# Altium PCB JacDacRHTemp 18.PcbDoc
Units mm, origin at the board's own origin, x right, y up, seen from the top; angles counter-clockwise.
Board outline 9.15 x 28.22 mm, 2 copper layers (Top Layer, Bottom Layer), stack 1.525 mm thick; 27 components, 19 nets, 93 pads, 16 vias.
Unrouted connection lines stored in the file: 14.
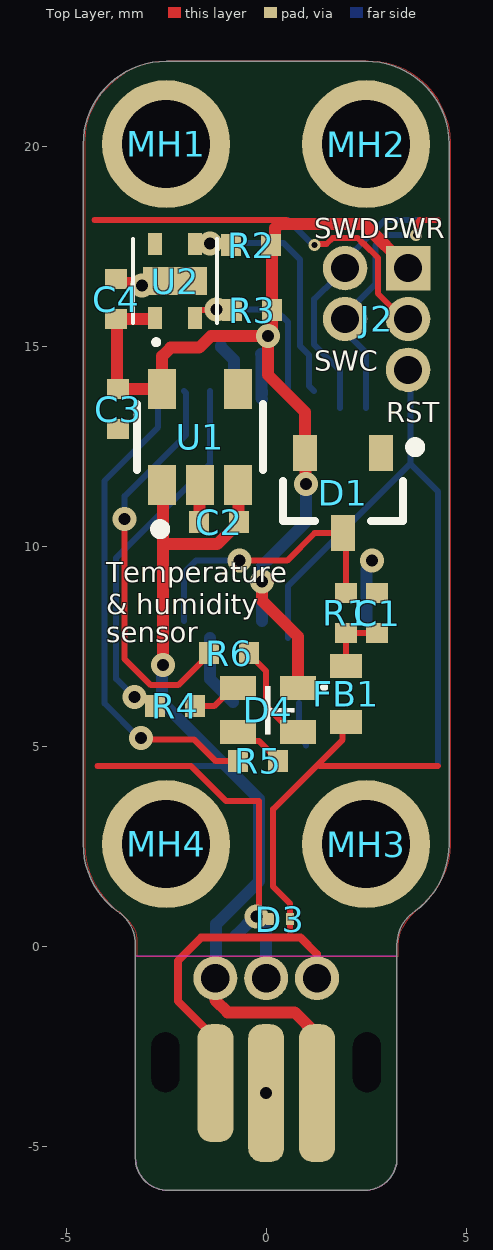
[diagram p0: Top Layer view]
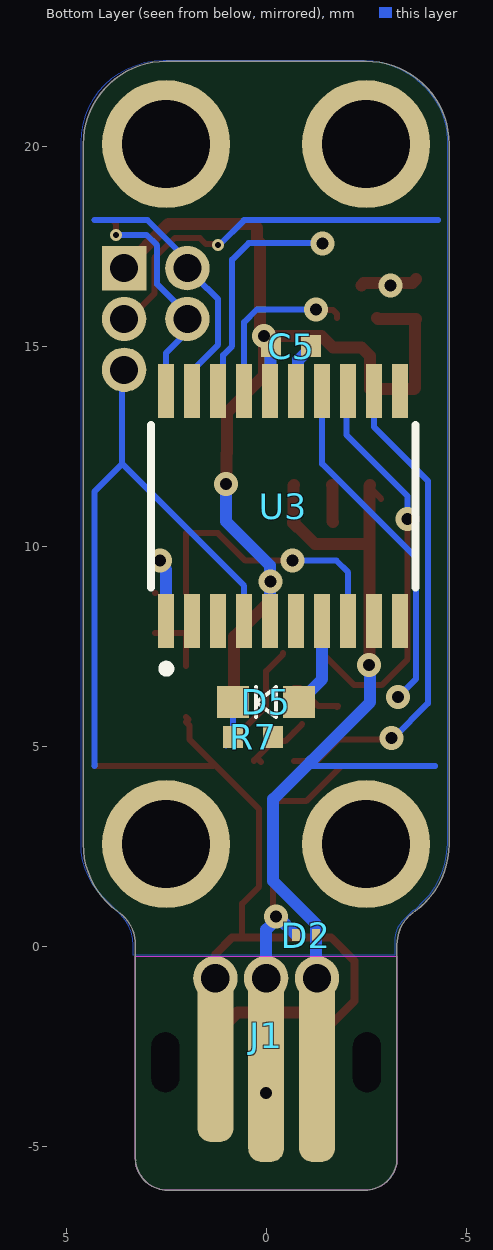
[diagram p1: Bottom Layer view, seen from below]
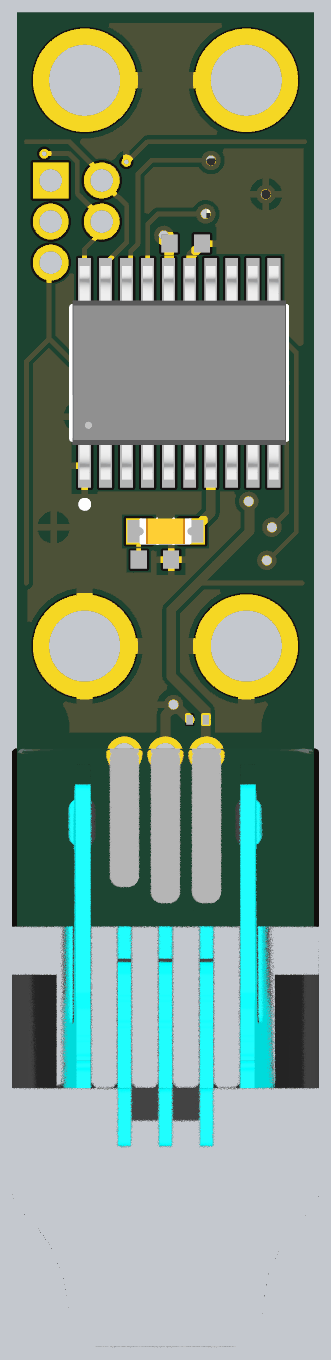
[diagram p2: 3D render of the assembled board from below, using the file's embedded part models]

## Layer stack, top to bottom
Top Solder: solder mask 0.0102, Solder Resist, Dk 3.5
Top Layer: signal copper 0.0356
Dielectric 1: core 1.454, FR-4, Dk 4.2
Bottom Layer: signal copper 0.0356
Bottom Solder: solder mask 0.0102, Solder Resist, Dk 3.5

## Board outline
-3.725,0.877 cw(c-4.27,0.039) -3.27,0.039 -3.27,-5.3 ccw(c-2.47,-5.3) -2.47,-6.1 2.47,-6.1 ccw(c2.47,-5.3) 3.27,-5.3 3.27,0.039 cw(c4.27,0.039) 3.725,0.877 ccw(c2.5,2.55) 4.573,2.55 4.573,20.05 ccw(c2.5,20.05) 2.5,22.123 -2.5,22.123 ccw(c-2.5,20.05) -4.573,20.05 -4.574,20.05 -4.574,2.55 ccw(c-2.5,2.55)

## Design rules (kind name [scope] priority, off if disabled: settings)
AssemblyTestPointUsage [All] p1: valid=2
BoardOutlineClearance [All] p1: gap=0.3 ignorepadtopadclearanceinfootprint=FALSE except(0: Arc-SplitContinuation Track-SplitContinuation SMDPad-OutlineEdge SMDPad-SplitContinuation THPad-OutlineEdge THPad-SplitContinuation Via-SplitContinuation Fill-SplitContinuation Poly-SplitContinuation Region-OutlineEdge Region-SplitContinuation Text-SplitContinuation; 0.2: Track-OutlineEdge Text-OutlineEdge)
Clearance [All] p1: gap=0.125 ignorepadtopadclearanceinfootprint=FALSE except(0: Arc-Hole Track-Hole SMDPad-Hole THPad-Hole Via-Hole Fill-Hole Poly-Hole Region-Hole Text-Hole)
ComponentClearance [All] p1: gap=0.2 collisioncheckmode=3 verticalgap=0.2 showdistances=FALSE
DiffPairsRouting [All] p1: maxlimit=2 minlimit=0.15 mostfreqgap=0.15 toplayer_minwidth=0.15 toplayer_maxwidth=2 toplayer_prefwidth=0.15 bottomlayer_minwidth=0.15 bottomlayer_maxwidth=2 bottomlayer_prefwidth=0.15 substack1={CB9D278B-8BF5-444A-AAF4-837A2A9DF42D} toplayer_{cb9d278b-8bf5-444a-aaf4-837a2a9df42d}_minwidth=0.381 toplayer_{cb9d278b-8bf5-444a-aaf4-837a2a9df42d}_maxwidth=0.381 toplayer_{cb9d278b-8bf5-444a-aaf4-837a2a9df42d}_prefwidth=0.381 bottomlayer_{cb9d278b-8bf5-444a-aaf4-837a2a9df42d}_minwidth=0.381 bottomlayer_{cb9d278b-8bf5-444a-aaf4-837a2a9df42d}_maxwidth=0.381 bottomlayer_{cb9d278b-8bf5-444a-aaf4-837a2a9df42d}_prefwidth=0.381 substack2={826B8647-A721-4255-895A-19F9591B9CD1} toplayer_{826b8647-a721-4255-895a-19f9591b9cd1}_minwidth=0.381 toplayer_{826b8647-a721-4255-895a-19f9591b9cd1}_maxwidth=0.381 toplayer_{826b8647-a721-4255-895a-19f9591b9cd1}_prefwidth=0.381 bottomlayer_{826b8647-a721-4255-895a-19f9591b9cd1}_minwidth=0.381 bottomlayer_{826b8647-a721-4255-895a-19f9591b9cd1}_maxwidth=0.381 bottomlayer_{826b8647-a721-4255-895a-19f9591b9cd1}_prefwidth=0.381 substack3={E64FCAF4-1BC8-437D-B1E0-0E5F2DC0F59E} toplayer_{e64fcaf4-1bc8-437d-b1e0-0e5f2dc0f59e}_minwidth=0.381 toplayer_{e64fcaf4-1bc8-437d-b1e0-0e5f2dc0f59e}_maxwidth=0.381 toplayer_{e64fcaf4-1bc8-437d-b1e0-0e5f2dc0f59e}_prefwidth=0.381 bottomlayer_{e64fcaf4-1bc8-437d-b1e0-0e5f2dc0f59e}_minwidth=0.381 bottomlayer_{e64fcaf4-1bc8-437d-b1e0-0e5f2dc0f59e}_maxwidth=0.381 bottomlayer_{e64fcaf4-1bc8-437d-b1e0-0e5f2dc0f59e}_prefwidth=0.381 substack4={E61CE66C-507C-4E1E-8E83-C905434AFC1C} toplayer_{e61ce66c-507c-4e1e-8e83-c905434afc1c}_minwidth=0.381 toplayer_{e61ce66c-507c-4e1e-8e83-c905434afc1c}_maxwidth=0.381 toplayer_{e61ce66c-507c-4e1e-8e83-c905434afc1c}_prefwidth=0.381 bottomlayer_{e61ce66c-507c-4e1e-8e83-c905434afc1c}_minwidth=0.381 bottomlayer_{e61ce66c-507c-4e1e-8e83-c905434afc1c}_maxwidth=0.381 bottomlayer_{e61ce66c-507c-4e1e-8e83-c905434afc1c}_prefwidth=0.381 maxuncoupledlength=25
FabricationTestPointUsage [All] p1: valid=2 allowmultiple=FALSE
HoleSize [All] p1: absolutevalues=TRUE maxlimit=2.54 minlimit=0.2 maxpercent=80.000 minpercent=20.000
MinimumSolderMaskSliver [All] p1: minsoldermaskwidth=0.005
PlaneClearance [All] p1: clearance=0.3
PlaneConnect [All] p1: planeconnectstyle=Relief reliefexpansion=0.5 reliefentries=4 reliefconductorwidth=0.2 reliefairgap=0.3
PolygonConnect "PolygonConnect GND" [isVIA] p1: connectstyle=Relief reliefconductorwidth=0.2 reliefentries=4 polygonreliefangle="90 Angle" airgapwidth=0.2
PolygonConnect [All] p2: connectstyle=Relief reliefconductorwidth=0.2 reliefentries=4 polygonreliefangle="90 Angle" airgapwidth=0.2
RoutingVias [All] p1: holewidth=0.3 width=0.6 viastyle="Through Hole" minholewidth=0.3 minwidth=0.6 maxholewidth=0.3 maxwidth=0.8
SilkToSilkClearance [All] p1: silktosilkclearance=0.001
SilkToSolderMaskClearance [IsPad] p1: minsilkscreentomaskgap=0.05 clearancetoexposedcopper=TRUE
SolderMaskExpansion [All] p1: expansion=0.075 istentingtop=FALSE
Width [All] p1: maxlimit=2 minlimit=0.15 preferedwidth=0.15 substack1={CB9D278B-8BF5-444A-AAF4-837A2A9DF42D} substack2={826B8647-A721-4255-895A-19F9591B9CD1} substack3={E64FCAF4-1BC8-437D-B1E0-0E5F2DC0F59E} substack4={E61CE66C-507C-4E1E-8E83-C905434AFC1C} minimp=50.000000 maximp=50.000000 favimp=50.000000
20 further rules are at their usual default settings.

## Components (designator, comment, footprint, x,y, rotation, side; value= is the part's Value field where it differs from the comment)
C1 "CL05C330JB51PNC" "C0402_0.55MM - without outline" 2.775,8.325 r270 top
C2 "CL05A105KP5NNNC" "C0402_0.55MM - without outline" -1.175,10.6 r0 top
C3 "CL05A105KP5NNNC" "C0402_0.55MM - without outline" -3.7,13.425 r90 top
C4 "CL05A105KP5NNNC" "C0402_0.55MM - without outline" -3.75,16.175 r270 top
C5 "CL05A105KP5NNNC" "C0402_0.55MM - without outline" -0.625,15 r0 bottom
D1 "BAT54S" NXP-BAT54S-TO-236AB 1.925,11.325 r270 top
D2 "VBUS05B1-SD0-G4-08" "0201-VBUS05B1-SD0-G4-08 - Without outline" -1,0.275 r0 bottom
D3 "VBUS05B1-SD0-G4-08" "0201-VBUS05B1-SD0-G4-08 - Without outline" 0.35,0.675 r180 top
D4 "HSMF-C114" HSMF-C114 0.05,5.9 r180 top
D5 "SML-D12D" "Rohm SML-D12 Orange - without outline" 0,6.1 r180 bottom
FB1 "TDK MPZ1608S102ATA00" "TDK MPZ1608 0.8mm - without outline" 2,6.3 r90 top
J1 "3 pin JACDAC edge connector" "JACDAC_EDGE_CONNECTOR_9.15MM_PCB_WIDE _without_MH" 0,-0.8 r0 bottom
J2 "Hack Connect Mini 1.27 mm pitch 2-row" HACK_CONNECT_MINI_5_X_1_27 3.55,16.95 r180 top
MH1 "MH_3.9MMNC_2.2MMD" MH_3.9MMC_2.2MMD_FULL_CIRCLE -2.5,20.05 r0 top
MH2 "MH_3.9MMNC_2.2MMD" MH_3.9MMC_2.2MMD_FULL_CIRCLE 2.5,20.05 r0 top
MH3 "MH_3.9MMNC_2.2MMD" MH_3.9MMC_2.2MMD_FULL_CIRCLE 2.5,2.55 r0 top
MH4 "MH_3.9MMNC_2.2MMD" MH_3.9MMC_2.2MMD_FULL_CIRCLE -2.5,2.55 r0 top
R1 "RC0402FR-07220RL" "R0402 - Without outline" 2,8.325 r270 top
R2 "10k" "R0402 - Without outline" -0.375,17.525 r180 top
R3 "10k" "R0402 - Without outline" -0.35,15.9 r180 top
R4 "RC0402FR-0730RL" "R0402 - WITHOUT OUTLINE" -2.275,6 r180 top
R5 "RC0402FR-0730RL" "R0402 - WITHOUT OUTLINE" -0.2,4.625 r180 top
R6 "RC0402FR-07150RL" "R0402 - Without outline" -0.925,7.325 r180 top
R7 "RC0402FR-071KL" "R0402 - Without outline" 0.325,5.225 r0 bottom
U1 "LDO 3.3V/300 mA" ON_SEMI-SOT23-5 -1.65,12.725 r90 top
U2 "SHTC3" SHTC3_4_WDFN -2.275,16.625 r90 top
U3 "STM32F030F4P6" 20-TSSOP -0.425,11 r90 bottom

## Footprints (in the part's own frame and the unit in brackets; to place one, negate y for a bottom-side part, rotate by r counter-clockwise, add the part's x,y. Pads: shape width x height; smd on the part's side, far side on the other; paste and mask are expansions set on the pad)
20-TSSOP [mm]
  rect 1.35x0.4 smd: 1(-2.875,2.925) 2(-2.875,2.275) 3(-2.875,1.625) 4(-2.875,0.975) 5(-2.875,0.325) 6(-2.875,-0.325) 7(-2.875,-0.975) 8(-2.875,-1.625) 9(-2.875,-2.275) 10(-2.875,-2.925) 11(2.875,-2.925) 12(2.875,-2.275) 13(2.875,-1.625) 14(2.875,-0.975) 15(2.875,-0.325) 16(2.875,0.325) 17(2.875,0.975) 18(2.875,1.625) 19(2.875,2.275) 20(2.875,2.925)
  silkscreen extent -4.16,-3.3 2.03,3.3, body extent -3.3,-3.3 3.3,3.3, height 1.2
"0201-VBUS05B1-SD0-G4-08 - Without outline" [mm]
  rect 0.2x0.3 smd mask+0.05: 1(-0.25,0) 2(0.25,0)
  body extent -0.3,-0.15 0.3,0.15, height 0.22
"C0402_0.55MM - without outline" [mm]
  rect 0.5x0.55 smd: 1(-0.5,0) 2(0.5,0)
  body extent -0.5,-0.25 0.5,0.25, height 0.55
HACK_CONNECT_MINI_5_X_1_27 [mm]
  rect 1.11x1.11 hole 0.7: 1(0,0)
  round 1.11 hole 0.7: 2(1.578,0) 3(0,1.27) 4(1.578,1.27) 5(0,2.54)
HSMF-C114 [mm] "LED RGB DIFFUSED CHIP SMD"
  rect 0.9x0.6 smd mask+0.05: 1(-0.75,-0.55) 2(-0.75,0.55) 3(0.75,0.55) 4(0.75,-0.55)
  silkscreen extent -1.45,-0.62 0.07,0.6, body extent -0.8,-0.75 0.8,0.75, height 0.55
"JACDAC_EDGE_CONNECTOR_9.15MM_PCB_WIDE _without_MH" [mm] "JacDac 3 pin connector without mounting holes"
  rrect78% 0.9x2.95 smd far side mask+0: 1(-1.27,2.625)
  round 1.11 / inner round 0.71 / far side round 1.1 hole 0.71 paste-0.254 mask+0: 1(1.27,0) 2(0,0) 3(-1.27,0)
  rrect78% 0.9x4.3 smd mask+0: 1(1.27,1.95)
  rrect78% 0.9x4.8 smd mask+0: 2(0,2.2) 3(-1.27,2.2)
  rrect78% 0.9x3.45 smd far side mask+0: 2(0,2.875) 3(1.27,2.875)
  round 0 hole 0.7 slot 1.5 at 90 deg unplated: ""(-2.52,2.1) ""(2.52,2.1)
  Top Layer keep-out region: -3.27,-0.55 -3.27,4.5 -3.209,4.806 -3.036,5.066 -2.776,5.239 -2.47,5.3 -2.47,5.3 2.47,5.3 2.776,5.239 3.036,5.066 3.209,4.806 3.27,4.5 3.27,4.5 3.27,-0.55
  Bottom Layer lines w0.2: -1.27,2.625 -1.27,1.513 -2.21,0.573 -2.21,-0.432 -1.626,-1.016 0.254,-1.016 0.554,-1.016 0.854,-1.016 1.27,-0.6 1.27,0
  Bottom Layer lines w0.3: -1.27,0 -1.27,0.55 -0.965,0.855 0.713,0.855 1.27,1.412 1.27,2.875
  Bottom Layer keep-out region: -3.27,-0.55 -3.27,4.5 -3.209,4.806 -3.036,5.066 -2.776,5.239 -2.47,5.3 -2.47,5.3 2.47,5.3 2.776,5.239 3.036,5.066 3.209,4.806 3.27,4.5 3.27,4.5 3.27,-0.55
  body extent -4.75,-0.18 4.75,20.32, height 1.52
MH_3.9MMC_2.2MMD_FULL_CIRCLE [mm] "Mounting Hole 3.9mm Diameter, 2.2mm PTH with 3.2 annualar ring"
  round 3.2 hole 2.2 mask+0.05: 1(0,0)
NXP-BAT54S-TO-236AB [mm] "SOT23, 3-Leads, Body 2.90x2.30mm, Pitch 0.95mm, IPC Medium Density"
  rect 0.9x0.6 smd: 1(-1,0.95) 2(-1,-0.95) 3(1,0)
  silkscreen extent -1.27,-1.5 0.7,1.93, body extent -1.32,-1.5 1.32,1.5, height 1.12
ON_SEMI-SOT23-5 [mm]
  rect 1x0.7 smd: 1(-1.2,0.95) 2(-1.2,0) 3(-1.2,-0.95) 4(1.2,-0.95) 5(1.2,0.95)
  silkscreen extent -2.42,-1.58 0.82,1.58, body extent -1.5,-1.57 1.5,1.58, height 1.1
"R0402 - Without outline" [mm]
  rect 0.5x0.55 smd: 1(-0.5,0) 2(0.5,0)
  body extent -0.5,-0.25 0.5,0.25, height 0.35
"R0402 - WITHOUT OUTLINE" [mm]
  rect 0.5x0.55 smd: 1(-0.5,0) 2(0.5,0)
  body extent -0.5,-0.25 0.5,0.25, height 0.35
"Rohm SML-D12 Orange - without outline" [mm]
  rect 0.8x0.8 smd paste-0.05: 1(-0.825,0) 2(0.825,0)
  silkscreen extent -0.25,-0.38 0.25,0.38, body extent -0.8,-0.4 0.8,0.4, height 0.54
SHTC3_4_WDFN [mm] "Humidity Temperature Sensor 0 ~ 100% RH I²C ±2% RH 8s Surface Mount"
  rect 0.55x0.35 smd paste-0.5 mask+0.05: 1(-0.925,0.5) 2(-0.925,-0.5)
  rect 0.55x0.35 smd paste-0.6 mask+0.05: 3(0.925,-0.5)
  rect 0.55x0.35 smd paste-0.2 mask+0.05: 4(0.925,0.5)
  rect 0.7x1.6 smd paste-0.1 mask+0.05: 5(0,0)
  rect 0.45x0.35 on Top Paste paste-0.6 mask+0.05: ""(-0.875,-0.5) ""(-0.875,0.5) ""(0.875,-0.5) ""(0.875,0.5)
  silkscreen extent -1.57,-1.05 1.05,1.05, body extent -1,-1 1,1, height 0.75
"TDK MPZ1608 0.8mm - without outline" [mm]
  rect 0.6x0.8 smd paste-0.1: 1(-0.7,0) 2(0.7,0)
  body extent -0.8,-0.4 0.8,0.4, height 0.8

## Part data
C1: "CAP CER 33PF 50V NP0 0402", Capacitance=33pF, Case Code (Imperial)=0402, Case Code (Metric)=1005, Manufacturer=Samsung, Max Operating Temperature=125°C, Min Operating Temperature=-55°C, Ratings=AEC-Q200, Supplier Part Number 1=1276-6515-1-ND, Tolerance=5%, Voltage Rating=50V, Case/Package=0402, Category=Capacitors, Checked=?, ComponentLink1Description="Samsung datasheet online", ComponentLink1URL=http://www.samsungsem.com/kr/support/library/product-catalog/mlcc.jsp, Created=DG, Lead Free="Lead Free", Length=0.039inch, Manufacturer Part Number=CL05C330JB51PNC, Mount="Surface Mount", Packaging="Tape and Reel", Pricing 1="1=0.10000, 10=0.07500, 50=0.04060, 100=0.03320, 500=0.02374, 1000=0.01865, 2500=0.01696, 5000=0.01560 (USD)", Pricing 2="1=0.11000, 10=0.08200, 100=0.03600, 500=0.02600, 1000=0.02000, 2500=0.01800 (USD)", Pricing 3="10000=0.00780 (USD)", RoHS=Yes, Stock 1=250654, Stock 2=97900, Stock 3=100000, Supplier 1=Digi-Key, Supplier 2=Mouser, Supplier 3="Future Electronics", Supplier Part Number 2=187-CL05C330JB51PNC, Supplier Part Number 3=6022520, Thickness=0.022inch, Width=0.02inch
C2 C3 C4 C5: "CAP CER 1UF 10V X5R 0402", Capacitance=1µF, Case Code (Imperial)=0402, Case Code (Metric)=1005, Dielectric=X5R, Manufacturer=Samsung, Max Operating Temperature=85°C, Min Operating Temperature=-55°C, Package Quantity=1, Supplier Part Number 1=1276-1076-1-ND, Tolerance=10%, Voltage Rating=10V, Case/Package=0402, Category=Capacitors, Checked=?, ComponentLink1Description="Online datasheet", ComponentLink1URL=https://datasheet.ciiva.com/15195/getdatasheetpartid-358390-15195630.pdf, Contact Plating=Tin, Created=DG, Depth=0.5mm, Height=0.5mm, Length=1mm, Manufacturer Part Number=CL05A105KP5NNNC, Material=Ceramic, Mount="Surface Mount", Packaging="Tape and Reel", Pricing 1="1=0.10000, 10=0.03900, 50=0.02100, 100=0.01720, 500=0.01228, 1000=0.00965, 2500=0.00877, 5000=0.00807 (USD)", Pricing 2="1=0.10000, 10=0.04200, 100=0.01800, 500=0.01300, 1000=0.01000, 2500=0.00900 (USD)", Pricing 3="10=0.02450, 100=0.02000, 500=0.01310, 2500=0.00920, 5000=0.00810, 10000=0.00640, 50000=0.00490 (GBP)", Radiation Hardening=No, RoHS=Yes, Stock 1=5705569, Stock 2=928941, Stock 3=53670, Supplier 1=Digi-Key, Supplier 2=Mouser, Supplier 3=Farnell, Supplier Part Number 2=187-CL05A105KP5NNNC, Supplier Part Number 3=3013329, Thickness=0.022inch, Width=0.02inch
D1: "DIODE ARRAY SCHOTTKY 30V SOT23", Manufacturer=Nexperia, Manufacturer Part Number=BAT54S,235, Supplier Part Number 1=1727-1868-1-ND, Category="Rectifier Diodes", ComponentLink1Description="NXP datasheet online", ComponentLink1URL=https://assets.nexperia.com/documents/data-sheet/BAT54_SER.pdf, Pricing 1="1=0.13000, 10=0.11900, 100=0.05610, 500=0.03326, 1000=0.02185, 5000=0.02138 (USD)", RoHS=No, Stock 1=14011, Supplier 1=Digi-Key, Supplier 2=Mouser, Supplier 3=RSComponents, Supplier Part Number 2=771-BAT54S235, Supplier Part Number 3=1707990
D2 D3: "TVS DIODE 5.5V 18V CLP0603", Capacitance=0.4pF, Case Code (Imperial)=0201, Case Code (Metric)=0603, Clamping Voltage=18V, Manufacturer="Vishay Semiconductors", Max Operating Temperature=150°C, Min Breakdown Voltage=6V, Min Operating Temperature=-55°C, Peak Pulse Current=2.5A, Peak Pulse Power=45W, Power Line Protection=No, Resistor Type=Zener, Reverse Standoff Voltage=5.5V, Supplier Part Number 1=VBUS05B1-SD0-G4-08GICT-ND, Case/Package=0201, Category="TVS Diodes", Checked By=?, ComponentLink2Description="Online datasheet", ComponentLink2URL=http://www.vishay.com/docs/85899/vbus05b1-sd0.pdf, Created By="D. Gakure", Direction=Bidirectional, Element Configuration=Single, Manufacturer Part Number=VBUS05B1-SD0-G4-08, Mount="Surface Mount", Number of Bidirectional Channels=1, Number of Pins=2, Packaging="Tape and Reel", Pricing 1="1=0.27000, 10=0.18500, 100=0.09020, 500=0.07524, 1000=0.05228, 2000=0.04531, 5000=0.04203 (USD)", Pricing 2="5=0.20800, 10=0.14000, 100=0.06340, 500=0.05020, 1000=0.04160, 5000=0.03300 (GBP)", Pricing 3="1=0.27000, 10=0.18500, 50=0.18500, 100=0.09300, 1000=0.03900, 10000=0.03400 (USD)", Pricing 4="1=0.17630, 10=0.14370, 25=0.14230, 100=0.07810, 250=0.07660, 500=0.06310, 15000=0.02980, 150000=0.02970, 1500000=0.02870, 7500000=0.02800 (USD)", RoHS=Yes, Stock 1=22028, Stock 2=13100, Stock 3=1209, Stock 4=719, Supplier 1=Digi-Key, Supplier 2=Farnell, Supplier 3=Mouser, Supplier 4="Arrow Electronics", Supplier Part Number 2=2932858, Supplier Part Number 3=78-VBUS05B1SD0-G4-08, Supplier Part Number 4=VBUS05B1-SD0-G4-08, Working Voltage=5.5V
D4: "Red, Green, Blue (RGB) 626nm Red, 525nm Green, 470nm Blue LED Indication - Discrete 1.9V Red, 3.4V Green, 3.4V Blue 0606 (1616 Metric)", Case Code (Imperial)=0606, Case Code (Metric)=1616, Color=Blue,Green,Red, Forward Current=20mA, Forward Voltage=3.4V, Lens Color=White, Manufacturer="Broadcom Avago", Max Operating Temperature=85°C, Min Operating Temperature=-40°C, Package Quantity=4000, Power Rating=78mW, Reverse Voltage=5V, Supplier Part Number 1=516-1795-1-ND, Case/Package=0606, Category=Optoelectronics, Checked By=?, ComponentLink1Description="Online datasheet", ComponentLink1URL=https://docs.broadcom.com/docs/AV02-2451EN, Created By="D. Gakure", Depth=1.6mm, Dominant Wavelength=470nm, Height=0.35mm, Lead Free="Lead Free", Length=1.6mm, Lens Style=Diffused,Rectangular, Lens Transparency=Diffused, Luminous Intensity=70mcd, Manufacturer Part Number=HSMF-C114, Mount="Surface Mount", Number of Elements=3, Number of LEDs=3, Number of Pins=4, Packaging="Tape and Reel", Pricing 1="1=1.78000, 10=1.12500, 100=0.83250, 500=0.76500, 1000=0.63000, 2000=0.59850 (USD)", Pricing 2="1=1.56000, 10=0.97100, 25=0.87800, 50=0.78500, 100=0.69200, 500=0.60500 (GBP)", Pricing 3="1=1.69000, 10=1.13000, 50=1.13000, 100=0.85600, 1000=0.74800, 10000=0.74800 (USD)", Radiation Hardening=No, REACH SVHC="No SVHC", RoHS=Yes, Stock 1=20555, Stock 2=8134, Stock 3=14991, Supplier 1=Digi-Key, Supplier 2=Farnell, Supplier 3=Mouser, Supplier Part Number 2=1058362, Supplier Part Number 3=630-HSMF-C114, Test Current=20mA, Viewing Angle=145°, Wavelength=470nm, Width=1.5mm
D5: "1.6 x 0.8 x 0.55mm (0603) LED 605nm Orange", Colour=Orange, Current - Test=20mA, Luminous Flux @ Current - Test=-, Manufacturer="Rohm Semiconductor", Manufacturer Part Number=SML-D12D8WT86, Millicandela Rating=100mcd, Package / Case="0603 (1608 Metric)", Supplier Part Number 1=511-1577-1-ND, Voltage - Forward (Vf) (Typ)=2.2V, Category=Optoelectronics, ComponentLink1Description=http://rohmfs.rohm.com/en/products/databook/datasheet/opto/led/chip_mono/sml-d1.pdf, ComponentLink1URL=http://rohmfs.rohm.com/en/products/databook/datasheet/opto/led/chip_mono/sml-d1.pdf, Height=0.55mm, Lens Style/Size="Rectangle with Flat Top, 1.2mm x 0.8mm", Lens Type="Diffused, White", Mounting Type="Surface Mount", Packaging="Cut Tape (CT)", Pricing 1="1=0.38, 10=0.279, 25=0.2232, 100=0.1478, 250=0.1046, 500=0.08926, 1000=0.06974 (GBP)", RoHS="RoHS Compliant", Size / Dimension="1.60mm L x 0.80mm W", Stock 1=1719, Supplier 1=Digi-Key, Viewing Angle=-, Wavelength - Dominant=605nm, Wavelength - Peak=-
FB1: "0603 1k@100MHz 0.8A chip", Case Code (Imperial)=0603, Case Code (Metric)=1608, Current Rating=800mA, DC Resistance (DCR)=300mR, Manufacturer=TDK, Manufacturer Part Number=MPZ1608S102ATA00, Package Quantity=4000, Supplier Part Number 1=445-8694-1-ND, Tolerance=25%, Case/Package=0603, ComponentLink2Description="datasheet online", ComponentLink2URL=https://www.mouser.co.uk/datasheet/2/400/eads_commercial_power_mpz1608_en-923650.pdf, ComponentLink3Description=datasheet, ComponentLink3URL="Y:\System\Altium\Libraries 2014\TDK\Datasheets\eads_commercial_power_mpz1608_en-923650.pdf", Core Material=Ferrite, Height=0.037inch, Impedance="1kR @ 100MHz", Length=0.063inch, Max DC Current=800mA, Mount="Surface Mount", Packaging="Tape and Reel", Pricing 1="1=0.1, 10=0.079, 25=0.0716, 50=0.0644, 100=0.0472, 250=0.03432, 500=0.03146, 1000=0.02717 (USD)", Stock 1=113542, Supplier 1=Digi-Key, Supplier 2=Mouser, Supplier Part Number 2=810-MPZ1608S102ATA00, Width=0.031inch
J1: library part "JACDAC edge connector", "3 pin JACDAC edge connector 1.27mm pitch", Manufacturer Part Number=JACDAC_EDGE_CONNECTOR, Checked By=?, ComponentLink1Description="Yuliang JACDAC cable connector drawing online", ComponentLink1URL=https://github.com/microsoft/jacdac-mdk/blob/main/connector/JACDAC-Connector-by-Yuliang-2020-11-28.pdf, ComponentLink2Description="JACDAC PCB edge connector spec onlin", ComponentLink2URL=https://github.com/microsoft/jacdac-mdk/blob/main/connector/JACDAC_PCB_Edge_Connector_Drawing_JD-PEC-01_rev_01.pdf, Created By="D. Gakure", PCB Type="1.6mm FR4"
J2: library part HACK_CONNECT_MINI
MH1 MH2 MH3 MH4: library part MH_3.9MMNC_2.2MMD_FULL_CIR, "Mounting Hole 3.9mm Diameter with 3.2 annualar ring, 2.2mm Drill PTH"
R1: "RES SMD 220 OHM 1% 1/16W 0402", Case Code (Imperial)=0402, Case Code (Metric)=1005, Manufacturer=Yageo, Max Operating Temperature=155°C, Max Power Dissipation=63mW, Min Operating Temperature=-55°C, Package Quantity=1, Power Rating=62.5mW, Resistance=220R, Resistor Type="Thick Film", Supplier Part Number 1=311-220LRCT-ND, Temperature Coefficient=100ppm/°C, Tolerance=1%, Voltage Rating=50V, Case/Package=0402, Category=Resistors, Checked=?, ComponentLink1Description=https://datasheet.ciiva.com/11819/0900766b80c66297-11819466.pdf?src-supplier=RSComponents, ComponentLink1URL=https://datasheet.ciiva.com/11819/0900766b80c66297-11819466.pdf?src-supplier=RSComponents, ComponentLink2Description=https://datasheet.ciiva.com/2453/pyu-r-int-thick-7-2453460.pdf?src-supplier=Digi-Key, ComponentLink2URL=https://datasheet.ciiva.com/2453/pyu-r-int-thick-7-2453460.pdf?src-supplier=Digi-Key, ComponentLink3Description=https://datasheet.ciiva.com/2453/pyu-r-int-thick-7-2453461.pdf?src-supplier=Digi-Key, ComponentLink3URL=https://datasheet.ciiva.com/2453/pyu-r-int-thick-7-2453461.pdf?src-supplier=Digi-Key, ComponentLink4Description=https://datasheet.ciiva.com/2453/pyu-r-int-thick-7-2453462.pdf?src-supplier=Digi-Key, ComponentLink4URL=https://datasheet.ciiva.com/2453/pyu-r-int-thick-7-2453462.pdf?src-supplier=Digi-Key, ComponentLink5Description=https://datasheet.ciiva.com/16746/pyu-rc0402-51-rohs-l-6-r-16746831.pdf?src-supplier=Future+Electronics, ComponentLink5URL=https://datasheet.ciiva.com/16746/pyu-rc0402-51-rohs-l-6-r-16746831.pdf?src-supplier=Future+Electronics, Created=D.G, Depth=0.5mm, Features="Moisture Resistant", Height=0.016inch, Lead Free="Lead Free", Length=1mm, Manufacturer Part Number=RC0402FR-07220RL, Military Standard=Not, Number of Pins=2, Number of Terminations=2, Packaging="Tape and Reel", Pricing 1="1=0.10000, 10=0.01400, 100=0.00580, 1000=0.00262, 2500=0.00228, 5000=0.00188 (USD)", Pricing 2="1=0.10000, 10=0.01200, 100=0.00400, 1000=0.00400, 2500=0.00400, 10000=0.00300 (USD)", Pricing 3="1=0.08130, 25=0.01210, 100=0.01120, 250=0.01030, 500=0.00900 (GBP)", REACH SVHC="No SVHC", RoHS=Yes, Stock 1=1286042, Stock 2=324625, Stock 3=18234, Supplier 1=Digi-Key, Supplier 2=Mouser, Supplier 3=Farnell, Supplier Part Number 2=603-RC0402FR-07220RL, Supplier Part Number 3=2147864, Termination=SMD/SMT, Voltage Rating (DC)=50V, Width=0.02inch
R2 R3: library part RC0402FR-0710KL, "RES SMD 10K OHM 1% 1/16W 0402", Case Code (Imperial)=0402, Case Code (Metric)=1005, Manufacturer=Yageo, Max Operating Temperature=155°C, Min Operating Temperature=-55°C, Power Rating=62.5mW, Resistance=10kR, Resistor Type="Thick Film", Supplier Part Number 1=311-10.0KLRCT-ND, Temperature Coefficient=100ppm/°C, Tolerance=1%, Voltage Rating=50V, Case/Package=0402, Category=Resistors, Checked=?, ComponentLink1Description=https://datasheet.ciiva.com/7660/38568-7660787.pdf?src-supplier=Element14, ComponentLink1URL=https://datasheet.ciiva.com/7660/38568-7660787.pdf?src-supplier=Element14, ComponentLink2Description=https://datasheet.ciiva.com/7849/1784430-7849813.pdf?src-supplier=Element14, ComponentLink2URL=https://datasheet.ciiva.com/7849/1784430-7849813.pdf?src-supplier=Element14, ComponentLink3Description=https://datasheet.ciiva.com/7849/1686128-7849814.pdf?src-supplier=Element14, ComponentLink3URL=https://datasheet.ciiva.com/7849/1686128-7849814.pdf?src-supplier=Element14, ComponentLink4Description=https://datasheet.ciiva.com/7849/1784430-7849815.pdf?src-supplier=Element14, ComponentLink4URL=https://datasheet.ciiva.com/7849/1784430-7849815.pdf?src-supplier=Element14, ComponentLink5Description=https://datasheet.ciiva.com/22747/1018594-22747512.pdf?src-supplier=Element14, ComponentLink5URL=https://datasheet.ciiva.com/22747/1018594-22747512.pdf?src-supplier=Element14, ComponentLink6Description=https://datasheet.ciiva.com/12667/pyu-rc0402-51-rohs-l-6-r-12667067.pdf?src-supplier=Mouser, ComponentLink6URL=https://datasheet.ciiva.com/12667/pyu-rc0402-51-rohs-l-6-r-12667067.pdf?src-supplier=Mouser, ComponentLink7Description=https://datasheet.ciiva.com/7983/1018594-7983486.pdf?src-supplier=Element14, ComponentLink7URL=https://datasheet.ciiva.com/7983/1018594-7983486.pdf?src-supplier=Element14, Created=DG, Depth=0.5mm, Height=0.32mm, Lead Free="Lead Free", Lead Pitch=0.2mm, Length=1mm, Manufacturer Part Number=RC0402FR-0710KL, Military Standard=Not, Number of Pins=2, Number of Terminations=2, Packaging="Tape and Reel", Pricing 1="1=0.10000, 10=0.01400, 100=0.00580, 1000=0.00262, 2500=0.00228, 5000=0.00188 (USD)", Pricing 2="1=0.10000, 10=0.01300, 100=0.00400, 1000=0.00300, 2500=0.00300, 10000=0.00200 (USD)", Pricing 3="10000=0.00350 (GBP)", REACH SVHC="No SVHC", RoHS=Yes, Stock 1=40173593, Stock 2=23672167, Stock 3=370000, Supplier 1=Digi-Key, Supplier 2=Mouser, Supplier 3=Farnell, Supplier Part Number 2=603-RC0402FR-0710KL, Supplier Part Number 3=2363463, Termination=SMD/SMT, Voltage Rating (DC)=50V, Width=0.5mm, Working Voltage=50V
R4 R5: "RES SMD 30 OHM 1% 1/16W 0402", Case Code (Imperial)=0402, Case Code (Metric)=1005, Manufacturer=Yageo, Max Operating Temperature=155°C, Max Power Dissipation=63mW, Min Operating Temperature=-55°C, Resistance=30R, Resistance Tolerance=1%, Resistor Type="Thick Film", Supplier Part Number 1=311-30LRCT-ND, Temperature Coefficient=100ppm/°C, Voltage Rating=50V, Case/Package=0402, Category="Chip SMD Resistors", Checked By=?, ComponentLink1Description="Online datasheet", ComponentLink1URL=https://datasheet.ciiva.com/7849/1018594-7849958.pdf, Construction=Rectangular, Contact Plating=Tin,Matte, Created By="D. Gakure", Depth=0.5mm, Features="Moisture Resistant", Height=0.35mm, Lead Free="Lead Free", Length=1mm, Manufacturer Part Number=RC0402FR-0730RL, Military Standard=Not, Number of Terminations=2, Packaging="Tape and Reel", Power Rating=63mW, Pricing 1="1=0.10000, 10=0.01400, 100=0.00580, 1000=0.00260, 2500=0.00226, 5000=0.00186 (USD)", Pricing 2="1=0.10000, 10=0.01200, 50=0.01200, 100=0.00400, 1000=0.00400, 10000=0.00300 (USD)", Pricing 3="10=0.01210, 100=0.00420, 500=0.00370, 2500=0.00280, 5000=0.00250, 10000=0.00230, 50000=0.00150 (GBP)", REACH SVHC=Unknown, RoHS=Yes, RoHS Compliant=Yes, Series=RC, Size Code=0402, Stock 1=2973, Stock 2=41804, Stock 3=4422, Supplier 1=Digi-Key, Supplier 2=Mouser, Supplier 3=Farnell, Supplier Part Number 2=603-RC0402FR-0730RL, Supplier Part Number 3=1458775, Termination=SMD/SMT, Tolerance=1%, Voltage Rating (DC)=50V, Width=0.5mm
R6: "RES SMD 150 OHM 1% 1/16W 0402", Case Code (Imperial)=0402, Case Code (Metric)=1005, Manufacturer=Yageo, Max Operating Temperature=155°C, Max Power Dissipation=63mW, Min Operating Temperature=-55°C, Package Quantity=1, Power Rating=62.5mW, Resistance=150R, Resistance Tolerance=1%, Resistor Type="Thick Film", Supplier Part Number 1=311-150LRCT-ND, Temperature Coefficient=100ppm/°C, Voltage Rating=50V, Case/Package=0402, Category="Chip SMD Resistors", Checked By=?, ComponentLink1Description="ine datasheet", ComponentLink1URL=https://datasheet.ciiva.com/11808/0900766b80c66297-11808422.pdf, Construction=Rectangular, Created By="D. Gakure", Depth=0.5mm, Features="Moisture Resistant", Height=0.016inch, Lead Free="Lead Free", Length=1mm, Manufacturer Part Number=RC0402FR-07150RL, Military Standard=Not, Number of Terminations=2, Packaging="Tape and Reel", Pricing 1="1=0.10000, 10=0.01400, 100=0.00580, 1000=0.00260, 2500=0.00226, 5000=0.00186 (USD)", Pricing 2="1=0.10000, 10=0.01200, 50=0.01200, 100=0.00400, 1000=0.00400, 10000=0.00300 (USD)", Pricing 3="10000=0.00270, 50000=0.00200 (GBP)", REACH SVHC="No SVHC", RoHS=Yes, RoHS Compliant=Yes, Series=RC, Stock 1=5214533, Stock 2=582717, Stock 3=880000, Supplier 1=Digi-Key, Supplier 2=Mouser, Supplier 3=Farnell, Supplier Part Number 2=603-RC0402FR-07150RL, Supplier Part Number 3=2421893, Technology="THICK FILM", Termination=SMD/SMT, Tolerance=1%, Width=0.02inch, Working Voltage=50V
R7: "RES SMD 1K OHM 1% 1/16W 0402", Case Code (Imperial)=0402, Case Code (Metric)=1005, Manufacturer=Yageo, Max Operating Temperature=155°C, Min Operating Temperature=-55°C, Power Rating=62.5mW, Resistance=1kR, Resistor Type="Thick Film", Supplier Part Number 1=311-1.00KLRDKR-ND, Temperature Coefficient=100ppm/°C, Tolerance=1%, Voltage Rating=50V, Case/Package=0402, Category=Resistors, Checked=?, ComponentLink2Description="Online datasheet", ComponentLink2URL=https://datasheet.ciiva.com/12666/pyu-rc0402-51-rohs-l-6-r-12666741.pdf, Created=D.G, Depth=0.5mm, Height=0.32mm, Lead Free="Lead Free", Length=1mm, Manufacturer Part Number=RC0402FR-071KL, Military Standard=Not, Number of Pins=2, Packaging="Tape and Reel", Pricing 1="1=0.10000, 10=0.01400, 100=0.00580, 1000=0.00262, 2500=0.00228, 5000=0.00188 (USD)", Pricing 2="1=0.10000, 10=0.01200, 100=0.00400, 1000=0.00400, 2500=0.00400, 10000=0.00300 (USD)", Pricing 3="1=0.08130, 25=0.01210, 100=0.01120, 250=0.01030, 500=0.00900 (GBP)", REACH SVHC=Unknown, RoHS=Yes, Stock 1=37591306, Stock 2=11912978, Stock 3=29900, Supplier 1=Digi-Key, Supplier 2=Mouser, Supplier 3=Farnell, Supplier Part Number 2=603-RC0402FR-071KL, Supplier Part Number 3=2132441, Termination=SMD/SMT, Voltage Rating (DC)=50V, Width=0.5mm
U1: library part NCP114ASN330T1G, "ON SEMICONDUCTOR - NCP114ASN330T1G - LDO Voltage Regulator, Fixed, 1.7 V to 5.5 V in, 3.3 V/300 mA out, 150 mV drop, TSOP-5", Case/Package=SOT-23-5, Dropout Voltage=225mV, Manufacturer="ON Semiconductor", Max Input Voltage=5.5V, Max Operating Temperature=85°C, Min Operating Temperature=-40°C, Min Output Voltage=3.3V, Output Current=300mA, Power Supply Rejection Ratio (PSRR)=75dB, Quiescent Current=95uA, Supplier Part Number 1=NCP114ASN330T1GOSCT-ND, Category="Voltage Regulators - Linear", Checked=?, ComponentLink3Description="On Semi datasheet online", ComponentLink3URL=http://www.onsemi.com/pub/Collateral/NCP114-D.PDF, Created=DG, Lead Free="Lead Free", Manufacturer Part Number=NCP114ASN330T1G, Mount="Surface Mount", Number of Regulators=1, Output Configuration=Positive, Output Type=Fixed, Packaging="Cut Tape", Pricing 1="1=0.33000, 10=0.24900, 25=0.21760, 100=0.12440, 250=0.11664, 500=0.09330, 1000=0.07153 (USD)", RoHS=No, Stock 1=32529, Supplier 1=Digi-Key, Supplier 2=RSComponents, Supplier 3=Mouser, Supplier Part Number 2=1263178, Supplier Part Number 3=863-NCP114ASN330T1G
U2: "Humidity Temperature Sensor 0 ~ 100% RH I²C ±2% RH 8s Surface Mount", Case/Package=DFN, Manufacturer=Sensirion, Max Operating Temperature=125°C, Min Operating Temperature=-40°C, Supplier Part Number 1=1649-1100-1-ND, Accuracy=2%, Category="Sensors Transducers", Checked By=?, ComponentLink1Description="Online datasheet", ComponentLink1URL=https://media.digikey.com/pdf/Data%20Sheets/Sensirion%20PDFs/HT_DS_SHTC3_D1.pdf, Created By="D. Gakure", Manufacturer Part Number=SHTC3, Mount="Surface Mount", Output Type=I2C, Packaging="Tape and Reel", Pricing 1="1=2.98000, 5=2.76200, 10=2.29500, 25=1.91240, 50=1.70000, 100=1.61500, 500=1.36000, 1000=1.27500 (USD)", Pricing 2="1=2.44000, 10=2.03000, 50=1.50000, 100=1.43000, 1000=1.13000, 10000=0.93700 (USD)", Pricing 3="1=2.94000, 25=1.98000, 50=1.84000, 250=1.59000, 500=1.56000 (GBP)", Pricing 4="2500=1.13700 (USD)", Response Time=8s, RoHS=No, Sensor Type=Temperature, Stock 1=10507, Stock 2=13209, Stock 3=3479, Stock 4=1085, Supplier 1=Digi-Key, Supplier 2=Mouser, Supplier 3=Farnell, Supplier 4=RSComponents, Supplier Part Number 2=403-SHTC3, Supplier Part Number 3=3106918, Supplier Part Number 4=1950668
U3: library part "ST STM32F030F4P6", "STMICROELECTRONICS - STM32F030F4P6 - 32 Bit Microcontroller, Value Line, ARM Cortex-M0, 48 MHz, 16 KB, 4 KB, 20, TSSOP RoHS Compliant: Yes", Case/Package=TSSOP, Frequency=48MHz, Manufacturer=STMicroelectronics, Max Operating Temperature=85°C, Max Power Dissipation=182mW, Max Supply Voltage=3.6V, Min Operating Temperature=-40°C, Min Supply Voltage=2.4V, Package Quantity=74, Supplier Part Number 1=2393635, Categories="Integrated Circuits", Category=Microcontrollers, Checked=?, ComponentLink1Description="Online datasheet", ComponentLink1URL=https://datasheet.ciiva.com/29720/dm00088500-29720640.pdf, Contact Plating=Gold, Core Architecture=ARM, Created=DG, Data Bus Width=32b, Height=1.05mm, Interface=I2C,SPI,UART,USART, Lead Free="Lead Free", Length=6.6mm, Manufacturer Part Number=STM32F030F4P6, Max Frequency=48MHz, Memory Size=16KB, Memory Type=FLASH, Number of ADC Channels=16, Number of I2C Channels=1, Number of I/Os=15, Number of Pins=20, Number of Programmable I/O=15, Number of PWM Channels=6, Number of SPI Channels=1, Number of Timers/Counters=5, Oscillator Type=Internal, Packaging=Rail/Tube, Peripherals=POR,PWM,WDT,DMA, Pricing 1="1=0.97500, 25=0.85400, 50=0.75500, 100=0.65600, 250=0.61800, 500=0.58000, 1000=0.52500, 2500=0.46900 (GBP)", Pricing 3="100=0.43900, 250=0.38800, 1000=0.37300 (GBP)", Radiation Hardening=No, RAM Size=4KB, REACH SVHC="No SVHC", RoHS=Yes, Stock 1=1196, Stock 3=48, Supplier 1=Farnell, Supplier 2=Digi-Key, Supplier 3=RSComponents, Supplier Part Number 2=497-14044-5-ND, Supplier Part Number 3=7925925P, Watchdog Timer=Yes, Width=4.5mm

## Via types
v1: diameter 0.6, hole 0.3, Top Layer to Bottom Layer, tented both sides, 14 vias
v2: diameter 0.3, hole 0.15, Top Layer to Bottom Layer, 2 vias

## Nets (pads, with @x,y where several pads share a name; then routed paths per layer and width w, separated by ;. In a path a pad name is that pad's centre, name@x,y a point inside that pad or via, vN(x,y) a via of type N, cw(c..) or ccw(c..) an arc to the next point about the centre after c; other vN are vias at no path point)
3V3: C3.2 C4.2 C5.2 D1.2 D4.1 J2.1 R2.1 R3.1 U1.5 U2.1 U3.5 U3.16 | length 31.3
  Top Layer w0.15: -4.299,18.15 0.511,18.15 0.6,18.055
  Top Layer w0.3: C4.2 -3.725,15.65 -3.725,13.95 C3.2 U1.5 -2.6,14.75 -2.388,14.962 -1.674,14.962 -1.385,15.251 v1(0.05,15.251) 0.05,14.275 0.975,13.35 D1.2 0.988,12.313 0.988,11.572 v1(1,11.56) ; C4.2@-3.7,15.675 -2.8,15.675 U2.1 ; v1@-0.1,9.225 -0.1,8.638 0.8,7.738 D4.1 ; v1@0.15,15.251 R3.1 0.15,17.575 0.225,17.65 0.225,17.954 0.326,18.055 0.6,18.055 2.445,18.055 J2.1
  Bottom Layer w0.3: C5.2@-0.125,14.8 -0.112,14.787 -0.112,13.687 U3.16@-0.1,13.675 ; U3.5 -0.1,9.514 1,10.614 v1(1,11.56) ; U3.16@-0.1,13.8 U3.16
  other v1: -0.109,9.122
GND: C1.1 C2.1 C3.1 C4.1 C5.1 D1.1 D2.2 D3.2 J1.2 J2.3 MH1.1 MH2.1 MH3.1 MH4.1 R7.1 U1.2 U2.4 U2.5 U3.1 U3.15 | length 25.3
  Top Layer w0.15: -4.224,4.5 -1.875,4.5 -1,3.625 -0.175,3.625 -0.175,0.812 v1(-0.246,0.741) ; v2(1.209,17.525) 1.238,17.554 1.508,17.554 1.659,17.705 2.285,17.705 2.44,17.55 2.455,17.55 2.795,17.21 2.795,16.312 3.427,15.68 J2.3 ; C1.1@2.77,8.83 C1.1
  Top Layer w0.3: C4.1 -3.655,16.58 -3.164,16.58 v1(-3.106,16.522) -3.055,16.574 -2.437,16.574 U2.5@-2.386,16.522 ; C2.1 -1.662,10.612 -1.662,11.513 U1.2 ; MH3.1 MH3.1@2.5,2.802
  Bottom Layer w0.15: -4.299,18.149 -4.297,18.15 0.55,18.15 1.179,17.525 v2(1.209,17.525) ; J2.3@3.427,15.68 J2.3
  Bottom Layer w0.3: C5.1 -1.125,14.975 -0.8,14.65 -0.8,13.925 U3.15 ; U3.15@-0.8,13.875 -0.8,13.725 U3.15@-0.75,13.675 ; D2.2 -0.284,0.741 v1(-0.246,0.741) -0.246,0.66 0,0.414 J1.2@0,-0.8 ; MH3.1@2.35,2.7 MH3.1 ; U3.1 2.504,8.129 2.504,9.411 2.65,9.557 v1(2.65,9.639)
  other v1: 0,-3.675
JD_DATA: D1.3 R1.1 U3.8 | length 7.1
  Top Layer w0.15: v1(-0.661,9.639) 0.522,9.639 1.209,10.325 D1.3 ; R1.1 D1.3@2,10.325
  Bottom Layer w0.15: U3.8 -2.05,9.345 -1.756,9.639 v1(-0.661,9.639)
JD_PWR: C2.2 D2.1 J1.3 U1.1 U1.3 | length 20.3
  Top Layer w0.15: U1.1@-2.875,11.182 -2.6,11.457 U1.1
  Top Layer w0.3: U1.1 -2.582,11.507 -2.582,7.032 v1(-2.575,7.025) ; -2.45,10.05 -1.225,10.05 -0.8,10.475 -0.775,10.475 -0.675,10.575 C2.2 ; C2.2@-0.713,10.612 C2.2@-0.713,10.812 ; U1.3 -0.687,11.512 C2.2@-0.687,10.812
  Bottom Layer w0.15: -4.224,4.5 -1.125,4.5
  Bottom Layer w0.3: v1(-2.575,7.025) -2.6,7 -2.6,6.1 -1.125,4.625 -0.175,3.675 -0.175,1.625 -1.25,0.55 D2.1 -1.25,-0.78 J1.3@-1.27,-0.8
JD_RGB_B: R4.2 U3.14 | length 8.8
  Bottom Layer w0.15: v1(-3.293,6.225) -3.75,6.682 -3.75,9.71 -1.4,12.06 U3.14
JD_RGB_G: R5.2 U3.12 | length 12.3
  Top Layer w0.15: v1(-3.135,5.202) -3.096,5.163 -1.8,5.163 -1.262,4.625 R5.2
  Bottom Layer w0.15: v1(-3.135,5.202) -3.174,5.202 -4.044,6.071 -4.044,11.631 -2.7,12.975 U3.12
JD_RGB_R: R6.2 U3.13 | length 10.1
  Top Layer w0.15: v1(-3.537,10.682) -3.537,7.176 -2.886,6.525 -2.2,6.525 R6.2@-1.425,7.3
  Bottom Layer w0.15: v1(-3.537,10.682) -3.537,11.25 -2.003,12.784 -2.003,13.828 U3.13
JD_STATUS: D5.2 U3.7 | length 1.8
  Bottom Layer w0.3: U3.7@-1.4,7.7 -1.4,6.675 D5.2
NetC1_2: C1.2 FB1.2 R1.2 | length 1.6
  Top Layer w0.15: FB1.2 R1.2 C1.2
NetD3_1: D3.1 FB1.1 J1.1 | length 9.4
  Top Layer w0.15: 0.554,0.216 0.6,0.262 D3.1 0.6,1.064 0.175,1.489 0.175,3.425 1.327,4.577 1.913,5.163 1.913,5.513 FB1.1 ; 1.327,4.5 4.298,4.5 ; FB1.1@1.937,5.662 FB1.1@2,5.725
NetD4_2: D4.2 R6.1 | length 2.6
  Top Layer w0.15: R6.1 -0.425,7.3 0,6.875 0,6 0.65,5.35 D4.2
NetD4_3: D4.3 R5.1 | length 1.7
  Top Layer w0.15: D4.3@-0.9,5.55 D4.3 -0.475,5.125 -0.175,5.125 0.3,4.65 R5.1 ; R5.1@0.125,4.6 R5.1@0.175,4.65
NetD4_4: D4.4 R4.1 | length 1.6
  Top Layer w0.15: R4.1@-1.8,6 R4.1@-1.775,5.975 ; R4.1 -1.3,6 -0.85,6.45 D4.4 D4.4@-0.925,6.225
NetD5_1: D5.1 R7.2 | length 1.1
  Bottom Layer w0.15: D5.1@0.825,6.075 R7.2 1,5.05 R7.2@1,5.018
nRESET: J2.5 U3.4 | length 15.4
  Bottom Layer w0.15: U3.4@0.55,7.7 U3.4 0.55,9.007 3.603,12.06 ; J2.5@3.603,13.955 3.603,12.06 ; 4.298,4.5 4.298,11.365 3.603,12.06
SHTC3_SCL: R3.2 U2.2 U3.17 | length 4.3
  Top Layer w0.15: U2.2 -1.775,15.8 -1.675,15.9 -1.263,15.9 v1(-1.245,15.917)
  Bottom Layer w0.15: v1(-1.245,15.917) 0.232,15.917 0.55,15.6 U3.17
SHTC3_SDA: R2.2 U2.3 U3.18 | length 5.9
  Bottom Layer w0.15: v1(-1.406,17.569) -1.4,17.575 0.437,17.575 0.85,17.162 0.85,14.998 1.075,14.773 1.075,14 U3.18
SWCLK: J2.4 U3.20 | length 6.4
  Top Layer w0.15: J2.4 J2.4@1.972,15.754 ; v2(3.75,17.78) 3.75,18.062 3.838,18.15 4.298,18.15
  Bottom Layer w0.15: J2.4@1.975,15.7 1.975,15.797 2.727,16.549 2.727,17.52 2.987,17.78 v2(3.75,17.78) ; J2.4@2,15.438 2,15.334 2.5,14.834 U3.20@2.5,13.45
SWDIO: J2.2 U3.19 | length 7
  Bottom Layer w0.15: U3.19@1.85,13.45 1.85,14.387 1.2,15.037 1.2,16.175 1.465,16.44 1.472,16.44 1.74,16.708 J2.2@2,16.708 ; J2.2 1.972,17.154 2.967,18.15 3.567,18.15 ; 3.567,18.149 3.572,18.154 ; 3.572,18.15 4.298,18.15
pads on no net: J1. U1.4 U2. U3.2 U3.3 U3.6 U3.9 U3.10 U3.11

## Polygon pours and split planes (outlines as drawn)
GND on Top Layer "NONET_L-01_P-001" (solid, shelved, pour order 0): -4.541,20.124 -4.541,2.542 ccw(c-2.481,2.542) -3.938,1.086 -3.746,0.894 ccw(c-3.684,0.956) -3.684,0.869 -3.409,0.593 cw(c-3.433,0.57) -3.399,0.57 cw(c-3.785,0.184) -3.24,0.184 -3.24,-0.248 -3.236,-0.251 3.304,-0.251 3.304,0.003 cw(c4.377,0.003) 3.618,0.762 4.046,1.19 ccw(c2.687,2.549) 4.609,2.549 4.609,20.075 ccw(c2.565,20.075) 4.01,21.52 ccw(c2.554,20.064) 2.554,22.124 -2.466,22.124 ccw(c-2.466,20.064) -3.923,21.52 -3.99,21.452 ccw(c-2.662,20.124)
GND on Bottom Layer "NONET_L-01_P-001" (solid, shelved, pour order 1): -4.521,20.144 -4.521,2.562 ccw(c-2.461,2.562) -3.917,1.106 -3.726,0.915 ccw(c-3.664,0.977) -3.664,0.889 -3.389,0.614 cw(c-3.413,0.59) -3.379,0.59 cw(c-3.765,0.204) -3.219,0.204 -3.219,-0.227 -3.216,-0.231 3.324,-0.231 3.324,0.024 cw(c4.397,0.024) 3.638,0.782 4.066,1.21 ccw(c2.707,2.569) 4.629,2.569 4.629,20.095 ccw(c2.585,20.095) 4.031,21.541 ccw(c2.574,20.084) 2.574,22.144 -2.445,22.144 ccw(c-2.445,20.084) -3.902,21.541 -3.97,21.473 ccw(c-2.642,20.144)

## Silkscreen, mask and mechanical layers (free items; w line width, h text height)
Top Overlay:
  text "SWD" at 1.2,17.7 h0.5
  text "PWR" at 2.9,17.7 h0.5
  text "SWC" at 1.2,14.387 h0.5
  text "RST" at 3,13.1 h0.5
  text "Temperature" at -4,9.1 h0.5
  text "& humidity" at -4,8.3 h0.5
  text "sensor" at -4,7.6 h0.5
Dimension:
  the board outline again, w0.1
Route Tool Path:
  circle w0.1: c-2.5,2.55 r2
  circle w0.1: c2.5,2.55 r2
Board Outline:
  the board outline again, w0.2
Top Assy:
  the board outline again, w0.1
Bottom Assy:
  the board outline again, w0.1

## Dimensions
-2.501,22.123 to 2.47,-6.1 on Dimension
-2.501,2.55 to 2.5,2.55 on Dimension

## Text inside footprints (layer, text, board x,y; h text height)
J1: Mechanical 9 "JACDAC  / cable connector  / body" at -4.821,-10.258 h1.7 r180; Mechanical 3 "Bevel/chamfer edge of PCB here" at 3.002,-7.55 h1.7 r180